# Altium PCB MMC_2_2.PcbDoc (part 1 of 2)
Units mm, origin at the board's own origin, x right, y up, seen from the top; angles counter-clockwise.
Board outline 99.21 x 82.02 mm, 4 copper layers (Top Layer, 3V3, GND, Bottom Layer), stack 0.778 mm thick; 83 components, 83 nets, 360 pads, 124 vias.
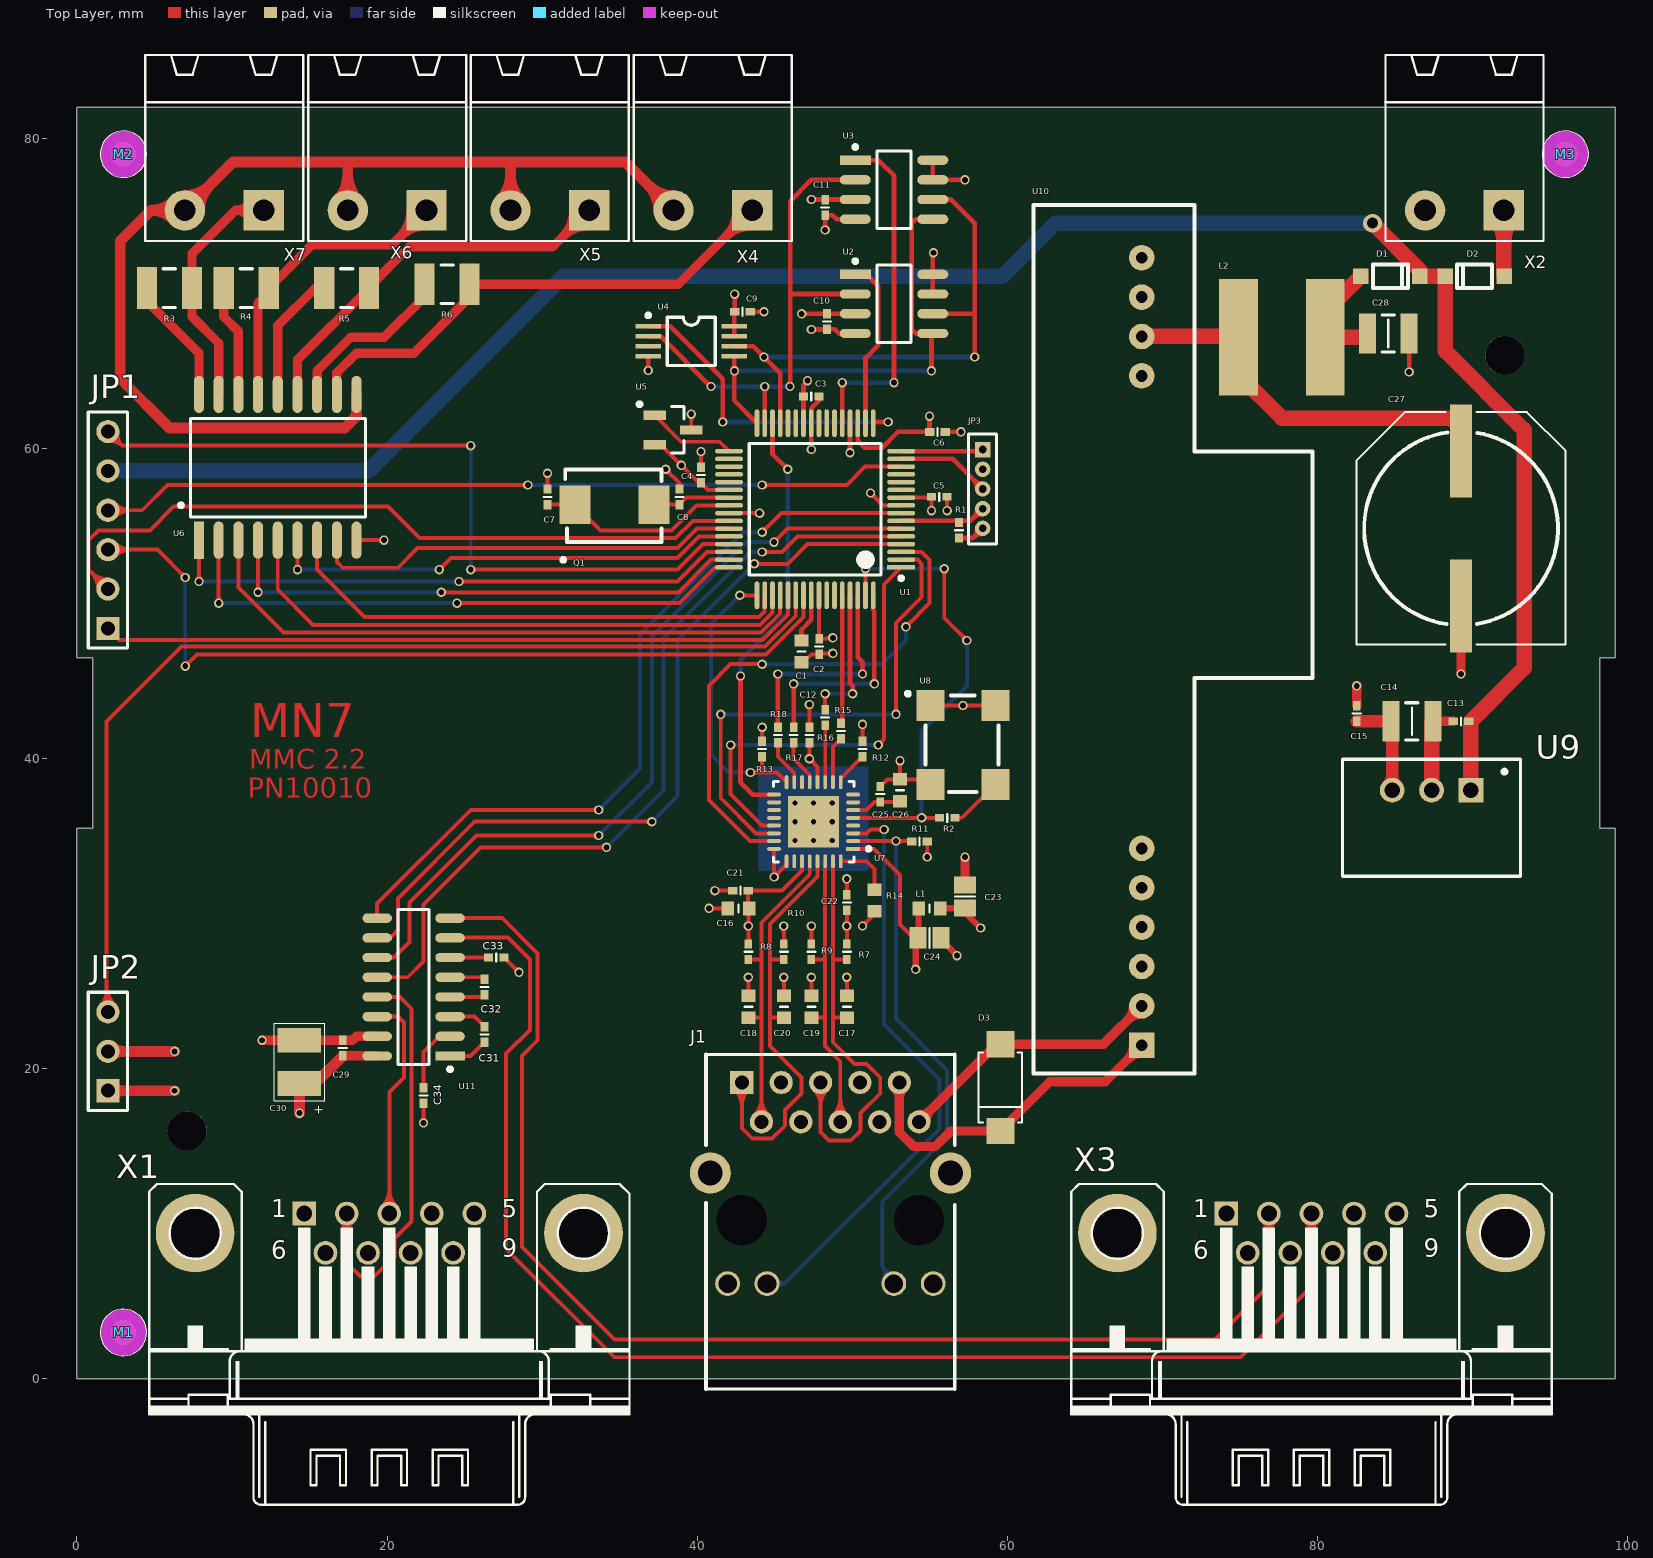
[diagram p0: Top Layer view]
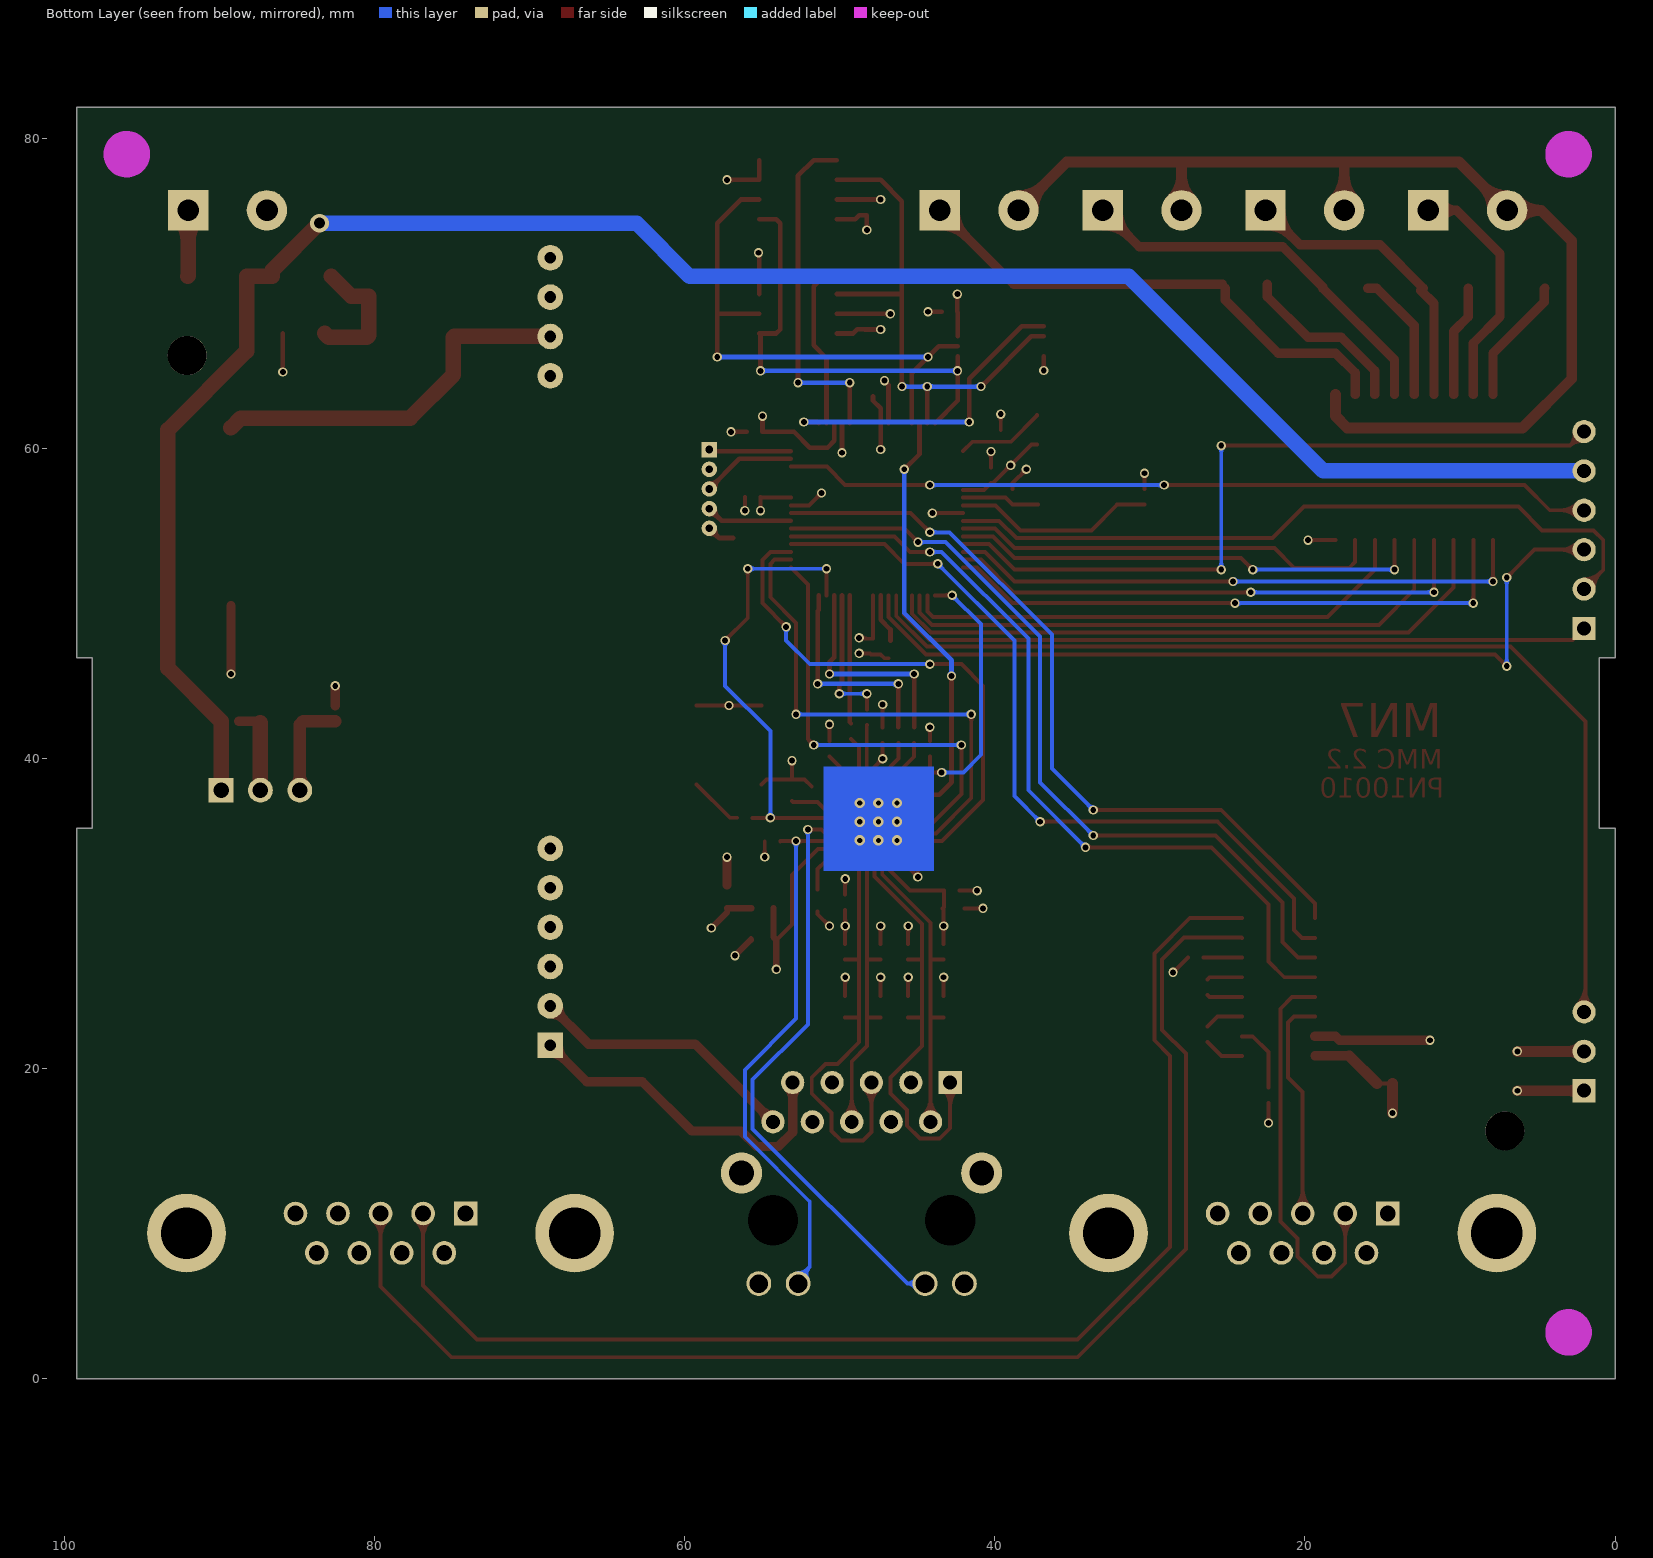
[diagram p1: Bottom Layer view, seen from below]
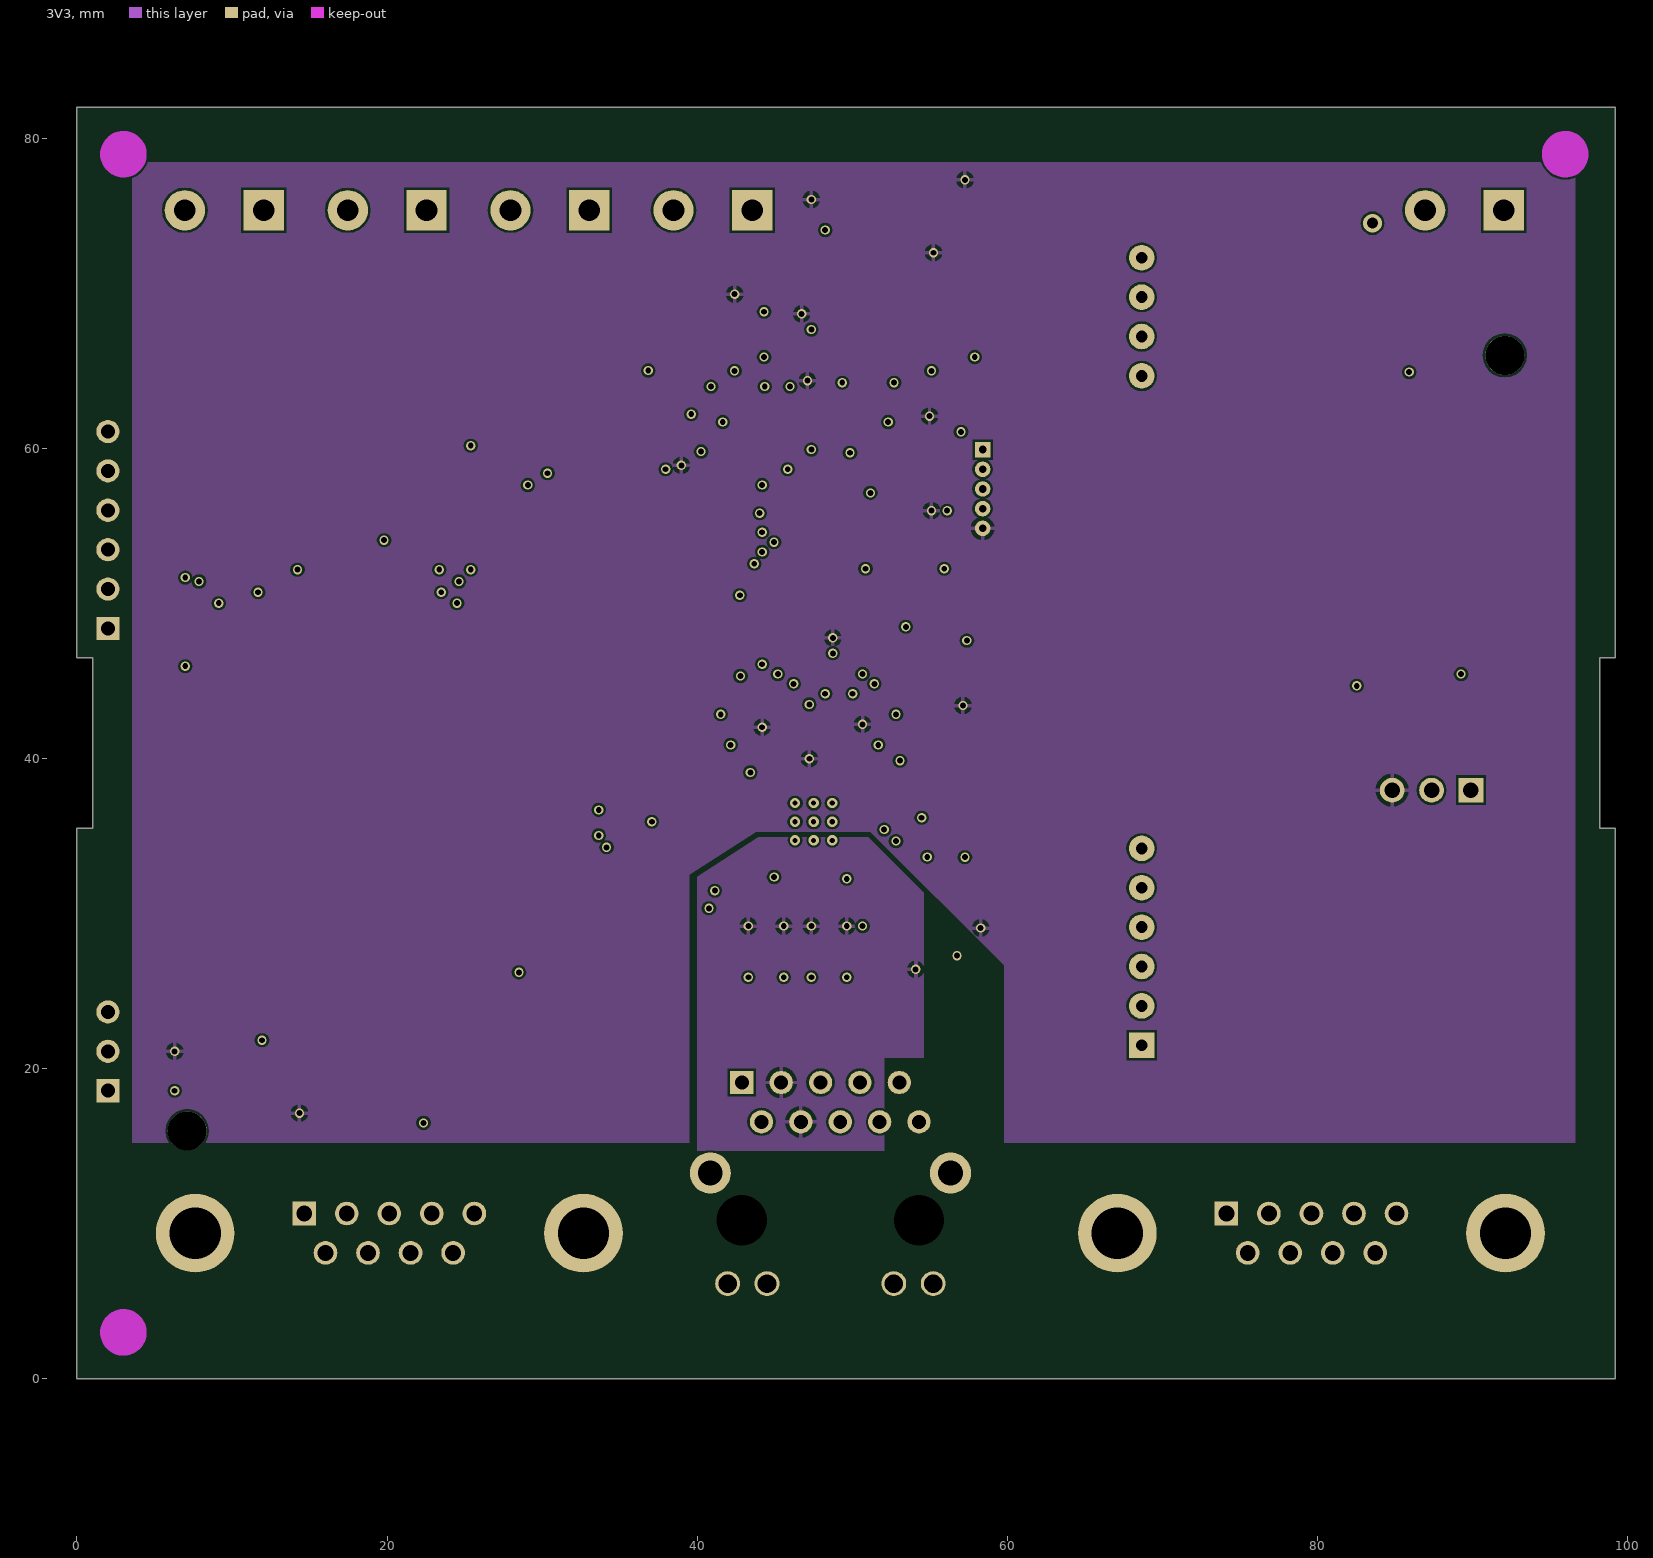
[diagram p2: 3V3]
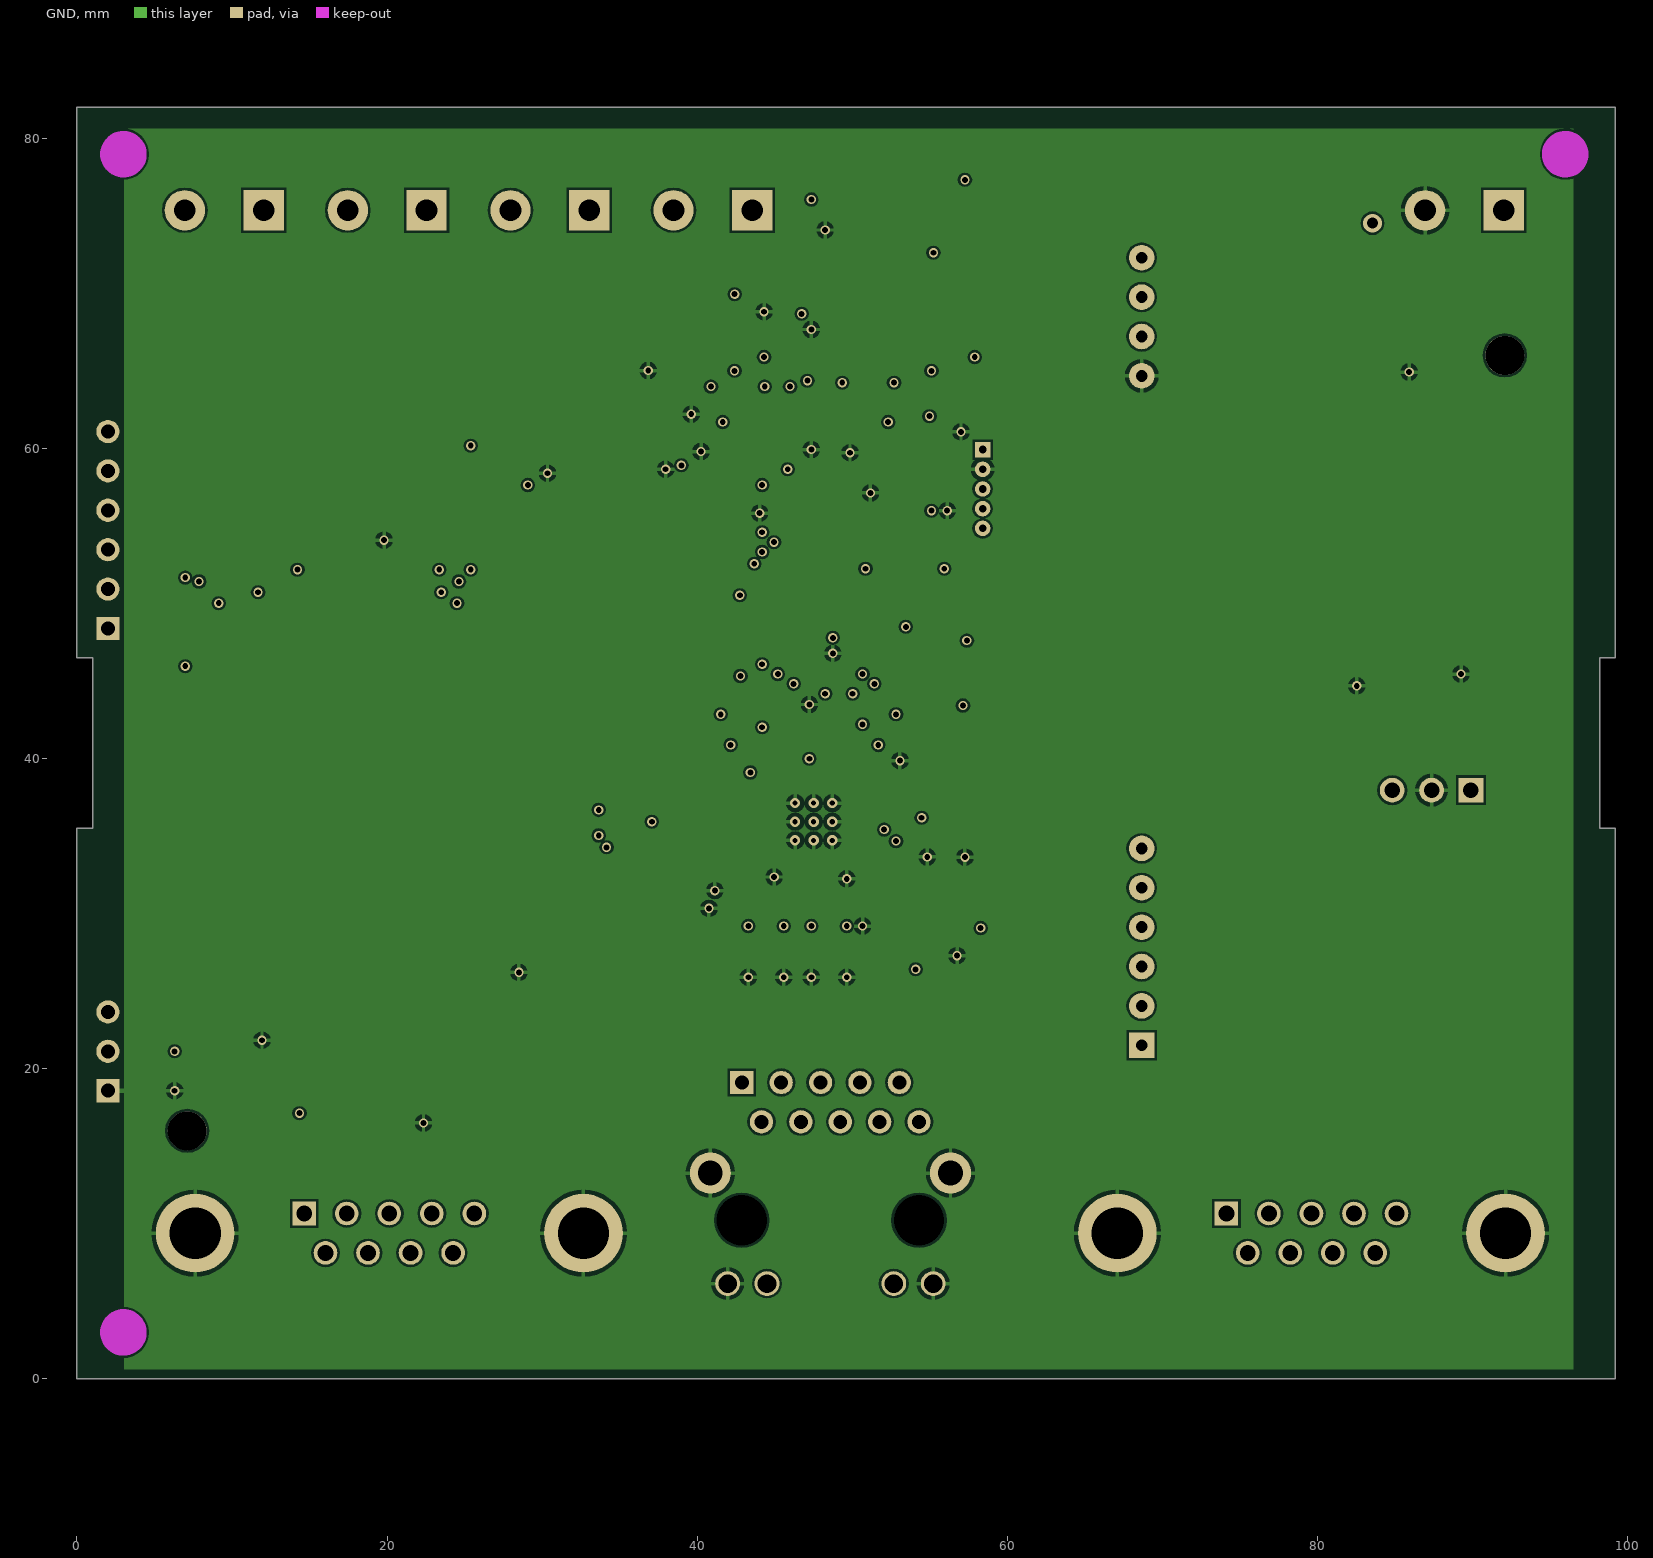
[diagram p3: GND]

## Layer stack, top to bottom
Top Solder: solder mask 0.0102, Solder Resist, Dk 3.5
Top Layer: signal copper 0.0356
Dielectric 1: core 0.254, FR-4, Dk 4.2
3V3: signal copper 0.036
Dielectric 3: prepreg 0.127, Dk 4.2
GND: signal copper 0.036
Dielectric 2: core 0.254, Dk 4.2
Bottom Layer: signal copper 0.0356
Bottom Solder: solder mask 0.0102, Solder Resist, Dk 3.5

## Board outline
0,0 0,35.509 1.016,35.509 1.016,46.507 0,46.507 0,82.017 99.212,82.017 99.212,46.507 98.222,46.507 98.222,35.509 99.212,35.509 99.212,0

## Design rules (kind name [scope] priority, off if disabled: settings)
Clearance [All] p1: gap=0.15
ComponentClearance [All] p1: gap=0 collisioncheckmode=3 verticalgap=0 showdistances=FALSE
HoleSize [All] p1: absolutevalues=TRUE maxlimit=4 minlimit=0.025 maxpercent=80.000 minpercent=20.000
MinimumSolderMaskSliver [(HasFootprint('32M1-A_M') AND  InComponent('R14') AND InComponent('R13') AND InComponent('JP3'))] p1: minsoldermaskwidth=0.05
MinimumSolderMaskSliver MinimumSolderMaskSliver_IC [HasFootprint('32M1-A_M')] p2: minsoldermaskwidth=0.03
PolygonConnect [All] p1: connectstyle=Relief reliefconductorwidth=0.254 reliefentries=4 polygonreliefangle="90 Angle" airgapwidth=0.254
RoomDefinition MMC_2_2_PSU [InComponentClass('MMC_2_2_PSU')] p1: confinementstyle=ConfineIn formatcopy=TRUE lockcomponents=FALSE outline -4.826,-12.446 103.378,-12.446 103.378,87.757 -4.826,87.757
RoomDefinition MMC_2_2_Ethernet [InComponentClass('MMC_2_2_Ethernet')] p2: confinementstyle=ConfineIn formatcopy=TRUE lockcomponents=FALSE outline -8.636,-9.398 106.934,-9.398 106.934,90.424 -8.636,90.424
RoomDefinition MMC_2_2_MCU [InComponentClass('MMC_2_2_MCU')] p3: confinementstyle=ConfineIn formatcopy=TRUE lockcomponents=FALSE outline -7.112,-10.922 105.283,-10.922 105.283,88.9 -7.112,88.9
RoutingVias [All] p1: holewidth=0.381 width=0.584 viastyle="Through Hole" minholewidth=0.3 minwidth=0.3 maxholewidth=0.711 maxwidth=1.27
SilkToBoardRegionClearance [(HasFootprint('M09HP') AND HasFootprint('MSTBA 2,5_2-G-5,08-LR') AND IsEmbeddedBoard)] p1:
SilkToSilkClearance [All] p1: silktosilkclearance=0.12
SilkToSolderMaskClearance SilkToSolderMaskClearance_1 [HasFootprint('M09HP')] p1: minsilkscreentomaskgap=0 clearancetoexposedcopper=TRUE
SilkToSolderMaskClearance [IsPad] p2: minsilkscreentomaskgap=0.05 clearancetoexposedcopper=TRUE
SolderMaskExpansion [All] p1: expansion=0.102
Width [All] p1: maxlimit=2 minlimit=0.254 preferedwidth=0.3
24 further rules are at their usual default settings.

## Classes and differential pairs
component class MMC_2_2_MCU: C1 C2 C3 C4 C5 C6 C7 C8 C9 C10 C11 JP1 JP2 JP3 M1 M2 M3 Q1 R1 U1 U2 U3 U4 U5
component class MMC_2_2_Ethernet: C12 C16 C17 C18 C19 C20 C21 C22 C23 C24 C25 C26 C29 C30 C31 C32 C33 C34 J1 L1 R2 R3 R4 R5 R6 R7 R8 R9 R10 R11 R12 R13 R14 R15 R16 R17 R18 U6 U7 U8 U11 X1 X3 X4 X5 X6 X7
component class MMC_2_2_PSU: C13 C14 C15 C27 C28 D1 D2 D3 L2 U9 U10 X2

## Components (designator, comment, footprint, x,y, rotation, side; value= is the part's Value field where it differs from the comment)
C1 "10uF10V_0603" C0603 46.736,46.928 r270 top
C2 "100nF16V_0402" C0402 47.879,47.244 r270 top
C3 "100nF16V_0402" C0402 47.363,63.373 r0 top
C4 "100nF16V_0402" C0402 40.259,58.301 r90 top
C5 "100nF16V_0402" C0402 55.626,56.896 r0 top
C6 "100nF16V_0402" C0402 55.499,61.087 r0 top
C7 "22pF50V_0402" C0402 30.353,56.896 r90 top
C8 "22pF50V_0402" C0402 38.862,56.896 r90 top
C9 "100nF16V_0402" C0402 42.926,68.834 r0 top
C10 "100nF16V_0402" C0402 48.387,68.199 r270 top
C11 "100nF16V_0402" C0402 48.26,75.565 r270 top
C12 "100nF16V_0402" C0402 47.244,41.529 r90 top
C13 "100nF25V_0402" C0402 89.281,42.418 r180 top
C14 "10uF25V_1210" C1210 86.106,42.418 r0 top
C15 "100nF25V_0402" C0402 82.55,42.926 r90 top
C16 "22nF50V_0603" C0603 42.672,30.353 r180 top
C17 "10pF50V_0603" C0603 49.657,24.003 r90 top
C18 "10pF50V_0603" C0603 43.307,24.003 r90 top
C19 "10pF50V_0603" C0603 47.371,24.003 r90 top
C20 "10pF50V_0603" C0603 45.593,24.003 r90 top
C21 "100nF25V_0402" C0402 42.799,31.496 r180 top
C22 "100nF25V_0402" C0402 49.657,30.734 r90 top
C23 "4u7F25V_0805" C0805 57.277,31.115 r90 top
C24 "4u7F25V_0805" C0805 54.991,28.448 r0 top
C25 "470pF50V_0402" C0402 51.816,37.719 r90 top
C26 "1uF50V_0603" C0603 53.086,37.973 r90 top
C27 "470uF25V_POL" Panasonic-H13 89.281,54.864 r90 top
C28 "10uF50V_1210" C1210 84.582,67.437 r0 top
C29 "100nF25V_0402" C0402 17.145,21.336 r90 top
C30 "10uF_20V_V293D-B" Vishay293D-B 14.351,20.447 r270 top
C31 "100n50V_0402" C0402 26.289,22.225 r270 top
C32 "100n50V_0402" C0402 26.289,25.273 r270 top
C33 "100n50V_0402" C0402 27.051,27.178 r0 top
C34 "100n50V_0402" C0402 22.352,18.288 r270 top
D1 "RB160M-30TR" SOD123 84.709,71.12 r0 top
D2 "SD103AW-V-GS08" SOD123 90.17,71.12 r180 top
D3 "SMAJ58A-E3/61" DO214A 59.563,18.796 r270 top
J1 "7499210121A" 7499210121A 48.6,10.23 r180 top locked
JP1 "Header 6_2.54" HDR1X6_2.54 2,54.76 r90 top
JP2 "Header-3" HDR1X3 2,21.13 r90 top
JP3 "ICDI" HDR1X5-1.27 58.42,57.404 r270 top
L1 "120R4A_0603" L0603 54.991,30.353 r0 top
L2 "10uF2A" WE-PD2_1 77.724,67.183 r0 top
M1 "Mark" Mark-3mm 3,3 r0 top
M2 "Mark" Mark-3mm 3,79 r0 top
M3 "Mark" Mark-3mm 96,79 r0 top
Q1 "7A-8.000MAAJ-T" TXC_7A 34.671,56.388 r0 top
R1 "10k_0402" R0402 56.896,54.737 r270 top
R2 "33R_0402" R0402 56.134,36.195 r180 top
R3 "270R_1210" R1210_N 5.969,70.358 r0 top
R4 "270R_1210" R1210_N 10.922,70.358 r0 top
R5 "270R_1210" R1210_N 17.399,70.358 r0 top
R6 "270R_1210" R1210_N 23.876,70.612 r0 top
R7 "49R9_0402" R0402 49.657,27.559 r90 top
R8 "49R9_0402" R0402 43.307,27.559 r90 top
R9 "49R9_0402" R0402 47.371,27.559 r90 top
R10 "49R9_0402" R0402 45.593,27.559 r90 top
R11 "10k_0402" R0402 54.348,34.671 r180 top
R12 "10k_0402" R0402 50.673,40.64 r90 top
R13 "1k5_0402" R0402 44.196,40.64 r90 top
R14 "12k1_0603" R0603(1608) 51.435,30.861 r90 top
R15 "10R_0402" R0402 49.276,41.783 r90 top
R16 "10R_0402" R0402 48.26,42.672 r90 top
R17 "10R_0402" R0402 46.228,41.529 r90 top
R18 "10R_0402" R0402 45.212,41.529 r90 top
U1 "PIC32MX695F512H-80I/PT" TQFP-64_N1 47.613,56.096 r180 top
U2 "25LC1024-I_SM" SOP8_N 52.705,69.342 r0 top
U3 "25LC1024-I_SM" SOP8_N 52.705,76.708 r0 top
U4 "23LC1024-I_ST" TSSOP8 39.624,66.929 r270 top
U5 "11AA02E48T-I_TT" SOT23_M 38.449,61.214 r0 top
U6 "ULN2803ADW" SOIC18-WIDE 12.954,58.801 r90 top
U7 "LAN8741-EN" 32M1-A_M 47.519,35.941 r180 top
U8 "TXC-7W-50.000MBB-T" TXC_7W 57.15,40.894 r270 top
U9 "R-783.3-0.5" R-783_3-0_5 87.376,37.973 r180 top
U10 "AG-9412-S" AG-9412-S-1 68.68,21.52 r90 top locked
U11 "MAX3232CSE" SOIC16_L 21.717,25.273 r180 top
X1 "SUB-D_9" M09HP 20.147,9.4 r0 top locked
X2 "PhoenixMSTBA-2" "MSTBA 2,5_2-G-5,08-LR" 89.5,75.4 r180 top locked
X3 "SUB-D_9" M09HP 79.63,9.4 r0 top locked
X4 "PhoenixMSTBA-2" "MSTBA 2,5_2-G-5,08-LR" 41.015,75.4 r180 top locked
X5 "PhoenixMSTBA-2" "MSTBA 2,5_2-G-5,08-LR" 30.5,75.4 r180 top locked
X6 "PhoenixMSTBA-2" "MSTBA 2,5_2-G-5,08-LR" 20.01,75.4 r180 top locked
X7 "PhoenixMSTBA-2" "MSTBA 2,5_2-G-5,08-LR" 9.5,75.4 r180 top locked

## Footprints (in the part's own frame and the unit in brackets; to place one, negate y for a bottom-side part, rotate by r counter-clockwise, add the part's x,y. Pads: shape width x height; smd on the part's side, far side on the other; paste and mask are expansions set on the pad)
32M1-A_M [mm] "QFN, 32-Leads, Body 5x5mm, Pitch 0.5mm, IPC Low Density"
  rect 0.9x0.25 smd: 1(-2.55,1.75)
  oval 0.9x0.25 smd: 2(-2.55,1.25) 3(-2.55,0.75) 4(-2.55,0.25) 5(-2.55,-0.25) 6(-2.55,-0.75) 7(-2.55,-1.25) 8(-2.55,-1.75) 17(2.55,-1.75) 18(2.55,-1.25) 19(2.55,-0.75) 20(2.55,-0.25) 21(2.55,0.25) 22(2.55,0.75) 23(2.55,1.25) 24(2.55,1.75)
  oval 0.25x0.9 smd: 9(-1.75,-2.55) 10(-1.25,-2.55) 11(-0.75,-2.55) 12(-0.25,-2.55) 13(0.25,-2.55) 14(0.75,-2.55) 15(1.25,-2.55) 16(1.75,-2.55) 25(1.75,2.55) 26(1.25,2.55) 27(0.75,2.55) 28(0.25,2.55) 29(-0.25,2.55) 30(-0.75,2.55) 31(-1.25,2.55) 32(-1.75,2.55)
  rect 3.3x3.3 smd: 33(0,0)
  silkscreen extent -3.68,-2.6 2.6,2.6, body extent -2.58,-2.58 2.58,2.58, height 1
7499210121A [mm] "Connector; PCB Jack, Thru-Hole; RJ45,POE; Shielded with Lightpipes; Right Angle"
  rect 1.5x1.5 hole 0.9: 1(5.715,-8.89)
  round 1.5 hole 0.9: 2(4.445,-6.35) 3(3.175,-8.89) 4(1.905,-6.35) 5(0.635,-8.89) 6(-0.635,-6.35) 7(-1.905,-8.89) 8(-3.175,-6.35) 9(-4.445,-8.89) 10(-5.715,-6.35)
  round 1.6 hole 1.2: 11(4.09,4.08) 12(6.63,4.08) 13(-4.09,4.08) 14(-6.63,4.08)
  round 2.65 hole 1.6: MH1(-7.745,-3.05) MH2(7.745,-3.05)
  round 2.95 hole 3.25 unplated: MH3(-5.715,0) MH4(5.715,0)
  silkscreen extent -8.02,-10.7 8.02,10.89, body extent -8,-10.67 8,11.18, height 13.74
AG-9412-S-1 [mm]
  rect 1.65x1.65 hole 0.762: 1(0,0)
  round 1.65 hole 0.762: 2(2.54,0) 3(5.08,0) 4(7.62,0) 5(10.16,0) 6(12.7,0) 7(43.18,0) 8(45.72,0) 9(48.26,0) 10(50.8,0)
  silkscreen extent -1.81,-11.02 54.2,6.98, body extent -1.8,-11 54.25,7, height 14
C0402 [mm] "Chip Capacitor, Body 1.0x0.5mm, IPC High Density"
  rect 0.6x0.5 smd: 1(-0.5,0) 2(0.5,0)
  silkscreen extent 0,-0.25 0,0.25, body extent -0.55,-0.3 0.55,0.3, height 0.5
C0603 [mm] "Chip Capacitor, 0603"
  rect 0.8x0.9 smd: 1(-0.7,0) 2(0.7,0)
  silkscreen extent 0,-0.25 0,0.25, body extent -0.87,-0.48 0.87,0.48, height 0.6
C0805 [mm] "Chip Capacitor, Body 2.0x1.3mm, IPC High Density"
  rect 1.1x1.4 smd: 1(-0.75,0) 2(0.75,0)
  silkscreen extent 0,-0.64 0,0.64, body extent -1.1,-0.72 1.1,0.72, height 1.4
C1210 [mm] "Chip Capacitor, Body 3.2x2.5mm, IPC High Density"
  rect 1.1x2.6 smd: 1(-1.35,0) 2(1.35,0)
  silkscreen extent -0.4,-1.2 0.4,1.2, body extent -1.7,-1.35 1.7,1.35, height 1.3
DO214A [mm] "Diode; 2 Leads"
  rect 1.7x1.8 smd: 1(2.8,0) 2(-2.8,0)
  silkscreen extent -2.25,-1.4 2.25,1.4, body extent -2.25,-1.4 2.25,1.4, height 2.3
HDR1X3 [mm] "Connector; Header; 3 Position"
  rect 1.5x1.5 hole 0.9: 1(-2.54,0)
  round 1.5 hole 0.9: 2(0,0) 3(2.54,0)
  silkscreen extent -3.81,-1.27 3.81,1.27, body extent -3.81,-1.27 3.81,1.27, height 7
HDR1X5-1.27 [mm] "Connector; Header; 5 Position"
  rect 1x1 hole 0.5: 1(-2.54,0)
  round 1 hole 0.5: 2(-1.27,0) 3(0,0) 4(1.27,0) 5(2.54,0)
  silkscreen extent -3.55,-0.9 3.55,0.9, body extent -3.56,-0.89 3.56,0.89, height 7
HDR1X6_2.54 [mm] "Connector; Header; 6 Position"
  rect 1.5x1.5 hole 0.9: 1(-6.35,0)
  round 1.5 hole 0.9: 2(-3.81,0) 3(-1.27,0) 4(1.27,0) 5(3.81,0) 6(6.35,0)
  silkscreen extent -7.62,-1.27 7.62,1.27, body extent -7.62,-1.27 7.64,1.27, height 7
L0603 [mm] "Chip Ferrit, 0603"
  rect 0.8x0.9 smd: 1(-0.7,0) 2(0.7,0)
  silkscreen extent 0,-0.25 0,0.25, body extent -0.87,-0.48 0.87,0.48, height 0.6
M09HP [mil]
  rect 60x60 hole 40: 1(-216,50)
  round 60 hole 40: 2(-108,50) 3(0,50) 4(108,50) 5(216,50) 6(-162,-50) 7(-54,-50) 8(54,-50) 9(162,-50)
  round 200 hole 130: 10(-493,0) 10(493,0)
  silkscreen extent -610,-690 610,125, body extent -610,-691 609,126, height 512
Mark-3mm [mm]
  round 1.6 smd paste-2: 0(0,0)
  Keep-Out Layer circle w2: c0,0 r0.5
  silkscreen extent -1.5,-1.5 1.5,1.5
"MSTBA 2,5_2-G-5,08-LR" [mm]
  rect 2.6x2.6 hole 1.4: 1(-2.54,0.02)
  round 2.6 hole 1.4: 2(2.54,0.02)
  silkscreen extent -5.1,-10 5.11,2, body extent -5.09,-10 5.11,1.99, height 8.6
Panasonic-H13 [mm] "SMD electrolytic, Panasonic"
  rect 6x1.4 smd: 1(5,0) 2(-5,0)
  silkscreen extent -7.5,-6.75 7.5,6.75, body extent -7.5,-6.75 7.5,6.75, height 13
R0402 [mm] "Chip Resistor, Body 1.0x0.5mm"
  rect 0.6x0.5 smd: 1(-0.5,0) 2(0.5,0)
  silkscreen extent 0,-0.25 0,0.25, body extent -0.55,-0.3 0.55,0.3, height 0.55
R0603(1608) [mm] "Chip Resistor, 0603"
  rect 0.8x0.9 smd: 1(-0.7,0) 2(0.7,0)
  body extent -0.87,-0.48 0.87,0.48, height 0.6
R1210_N [mm] "Chip Resistor Body 3.2x2.5mm"
  rect 1.3x2.7 smd: 1(-1.45,0) 2(1.45,0)
  silkscreen extent -0.4,-1.25 0.4,1.25, body extent -1.7,-1.35 1.7,1.35, height 1.5
R-783_3-0_5 [mm] "Recon DC-DC"
  rect 1.6x1.6 hole 1: 1(-2.54,0)
  round 1.6 hole 1: 2(0,0) 3(2.54,0)
  silkscreen extent -5.75,-2 5.75,5.55, body extent -5.72,-2.03 5.71,5.59, height 10.2
SOD123 [mm]
  rect 1x1 smd: 1(1.905,0) 2(-1.905,0)
  silkscreen extent -1.1,-0.76 1.14,0.76, body extent -1.4,-0.85 1.4,0.88, height 1.4
SOIC16_L [mm] "SOIC, 16-Leads, Body 9.9x3.9mm, Pitch 1.27mm, IPC High Density"
  rect 1.9x0.6 smd: 1(-2.35,4.445)
  oval 1.9x0.6 smd: 2(-2.35,3.175) 3(-2.35,1.905) 4(-2.35,0.635) 5(-2.35,-0.635) 6(-2.35,-1.905) 7(-2.35,-3.175) 8(-2.35,-4.445) 9(2.35,-4.445) 10(2.35,-3.175) 11(2.35,-1.905) 12(2.35,-0.635) 13(2.35,0.635) 14(2.35,1.905) 15(2.35,3.175) 16(2.35,4.445)
  silkscreen extent -2.48,-5 1,5.42, body extent -2,-5 2,5, height 1.91
SOIC18-WIDE [mm] "SOIC, 18-Leads"
  rect 2.4x0.65 smd: 1(-4.7,5.08)
  oval 2.4x0.65 smd: 2(-4.7,3.81) 3(-4.7,2.54) 4(-4.7,1.27) 5(-4.7,0) 6(-4.7,-1.27) 7(-4.7,-2.54) 8(-4.7,-3.81) 9(-4.7,-5.08) 10(4.7,-5.08) 11(4.7,-3.81) 12(4.7,-2.54) 13(4.7,-1.27) 14(4.7,0) 15(4.7,1.27) 16(4.7,2.54) 17(4.7,3.81) 18(4.7,5.08)
  silkscreen extent -3.2,-5.65 3.15,6.37, body extent -3.8,-5.65 3.85,5.64, height 1.91
SOP8_N [mm] "SOIC, 8-Leads, Body 4.9x3.9mm, Pitch 1.27mm, IPC Medium Density"
  rect 2x0.6 smd: 1(-2.5,1.905)
  oval 2x0.6 smd: 2(-2.5,0.635) 3(-2.5,-0.635) 4(-2.5,-1.905) 5(2.5,-1.905) 6(2.5,-0.635) 7(2.5,0.635) 8(2.5,1.905)
  silkscreen extent -2.62,-2.5 1.1,2.88, body extent -2,-2.5 2,2.5, height 1.75
SOT23_M [mm] "SOT23, 3-Leads, Body 2.9x1.3mm, Pitch 0.95mm, Lead Span 2.3mm - Reverse Pinning, IPC Low Density"
  rect 1.45x0.6 smd: 1(1.175,0) 2(-1.175,-0.95) 3(-1.175,0.95)
  silkscreen extent -2.28,-1.5 0.7,1.78, body extent -0.7,-1.5 0.7,1.5, height 1.1
TQFP-64_N1 [mm] "64-Pin Thin Plastic Quad Flat Pack 0.5 mm Pitch, 1.0/0.1 mm Lead Form, IPC Medium Density"
  rect 1.8x0.3 smd: 1(-5.55,3.75)
  oval 1.8x0.3 smd: 2(-5.55,3.25) 3(-5.55,2.75) 4(-5.55,2.25) 5(-5.55,1.75) 6(-5.55,1.25) 7(-5.55,0.75) 8(-5.55,0.25) 9(-5.55,-0.25) 10(-5.55,-0.75) 11(-5.55,-1.25) 12(-5.55,-1.75) 13(-5.55,-2.25) 14(-5.55,-2.75) 15(-5.55,-3.25) 16(-5.55,-3.75) 33(5.55,-3.75) 34(5.55,-3.25) 35(5.55,-2.75) 36(5.55,-2.25) 37(5.55,-1.75) 38(5.55,-1.25) 39(5.55,-0.75) 40(5.55,-0.25) 41(5.55,0.25) 42(5.55,0.75) 43(5.55,1.25) 44(5.55,1.75) 45(5.55,2.25) 46(5.55,2.75) 47(5.55,3.25) 48(5.55,3.75)
  oval 0.3x1.8 smd: 17(-3.75,-5.55) 18(-3.25,-5.55) 19(-2.75,-5.55) 20(-2.25,-5.55) 21(-1.75,-5.55) 22(-1.25,-5.55) 23(-0.75,-5.55) 24(-0.25,-5.55) 25(0.25,-5.55) 26(0.75,-5.55) 27(1.25,-5.55) 28(1.75,-5.55) 29(2.25,-5.55) 30(2.75,-5.55) 31(3.25,-5.55) 32(3.75,-5.55) 49(3.75,5.55) 50(3.25,5.55) 51(2.75,5.55) 52(2.25,5.55) 53(1.75,5.55) 54(1.25,5.55) 55(0.75,5.55) 56(0.25,5.55) 57(-0.25,5.55) 58(-0.75,5.55) 59(-1.25,5.55) 60(-1.75,5.55) 61(-2.25,5.55) 62(-2.75,5.55) 63(-3.25,5.55) 64(-3.75,5.55)
  silkscreen extent -5.68,-4.25 4.25,4.57, body extent -5,-5 5,5, height 1.2
TSSOP8 [mm] "Shrink Small Outline, Plastic, Thin; 8 Leads; Body Width 4.4 mm; Pitch 0.65 mm"
  rect 0.3x1.65 smd: 1(-0.975,-2.775) 2(-0.325,-2.775) 3(0.325,-2.775) 4(0.975,-2.775) 5(0.975,2.775) 6(0.325,2.775) 7(-0.325,2.775) 8(-0.975,2.775)
  silkscreen extent -1.8,-2.9 1.55,1.55, body extent -1.52,-1.52 1.52,1.52, height 1
TXC_7A [mm]
  rect 2x2.5 smd: 1(-2.54,0) 2(2.54,0)
  silkscreen extent -3.43,-3.68 3.05,2.29, body extent -3.17,-2.41 3.05,2.25, height 1.3
TXC_7W [mm]
  rect 2x1.8 smd: 1(-2.54,-2.1) 2(2.54,-2.1) 3(2.54,2.1) 4(-2.54,2.1)
  silkscreen extent -3.43,-3.68 3.05,2.29, body extent -3.18,-2.41 3.05,2.25, height 1.3
Vishay293D-B [mm]
  rect 1.6x2.8 smd: 1(1.397,0) 2(-1.397,0)
  silkscreen extent -2.5,-1.63 2.5,1.63, body extent -1.75,-1.38 1.75,1.38, height 1.6
WE-PD2_1 [mm]
  rect 2.5x7.5 smd: 1(-2.794,0) 2(2.794,0)
  body extent -3.9,-3.49 3.89,3.49, height 5

## Part data
C1 C2 C3 C4 C5 C6 C9 C10 C11 C12 C14: "Capacitor"
C7 C8: "Murata, GRM series, 50V"
C13 C15 C21 C22 C29: "AVX, X5R, 10%, 25V"
C16: "AVX ,  X7R, 5%, 50V"
C17 C18 C19 C20: "AVX ,  +-0.5pF, 50V"
C23 C24: "TDK  C series, X7R, 10%, 25V"
C25: "AVX, 50V"
C26: "C series, X5R, 10%"
C27: "Panasonic, TG series"
C28: "AVX,  X7R, 10%, 50V"
C30: "293 series, tantal, 10%, 10V"
C31 C32 C33 C34: "C series, X5R, 10%, 50V"
D1 D2: "Diode Schottky,2A,40V"
D3: "TVS, 400W, 58V"
J1: library part "Ethernet, POE, WE7499210121A", "Modular Jack , Right Angle RJ-45, Low Profile"
JP1: "Header, 6-Pin"
JP2: "Header-3-Pin"
JP3: "Header, 5-Pin"
L1: "Murata, Ferrit, 120Rx2A"
L2: library part 10uF2A_WE-PD2, "WE-PD2, 10uF2A"
Q1: library part Crystal_8MHz, "Crystal, 7A-8.000MAAJ-T"
R1 R11 R12 R13 R15 R16 R17 R18: "Vishay CRCW series, 125mW, 1%"
R2 R7 R8 R9 R10: "Vishay CRCW series, 63mW, 1%"
R3 R4 R5 R6: "ERJ series, 500mW, 5%"
R14: "Vishay, CRCW series, 100mW, 1%"
U1: "High Performance ROM-less Microcontroller with External Memory Bus, 1.5K RAM, 64-Pin TQFP, 4.2 to 5.5V Supply Range, Industrial Temperature"
U2 U3: "1024 Kbit Serial SPI Bus EEPROM"
U4: "1 Mbit Serial  EEPROM"
U5: "2 kbit Serial  EEPROM"
U6: "Darlington array, 50V"
U7: "Ethernet Phy"
U8: "Crystal"
U9: library part Recom-R-783_3-0_5, "Voltage Regulator"
U10: "PoE, 12V"
U11: "RS232 transceiver"

## Free pads (board coordinates)
  round 2.515 hole 2.515: 1(7.112,16.002) 1(92.1,66.015)

## Via types
v1: diameter 0.6, hole 0.381, Top Layer to Bottom Layer, 114 vias
v2: diameter 0.66, hole 0.33, Top Layer to Bottom Layer, tented top, 9 vias
v3: diameter 1.2, hole 0.711, Top Layer to Bottom Layer, 1 vias

## Nets (pads, with @x,y where several pads share a name; then routed paths per layer and width w, separated by ;. In a path a pad name is that pad's centre, name@x,y a point inside that pad or via, vN(x,y) a via of type N, cw(c..) or ccw(c..) an arc to the next point about the centre after c; other vN are vias at no path point)
3V3: C2.1 C3.1 C4.1 C5.1 C6.1 C9.1 C10.1 C11.1 C12.1 C14.1 C15.1 C23.1 C29.1 C30.1 JP2.2 JP3.5 L1.2 R1.2 R12.2 R13.2 U1.10 U1.19 U1.26 U1.38 U1.57 U2.3 U2.7 U2.8 U3.3 U3.7 U3.8 U4.7 U4.8 U5.2 U7.12 U8.1 U8.4 U9.3 U11.16 | length 83.6
  Top Layer w0.254: C30.1@14.351,19.05 C30.1@15.359,19.05 ; U11.16@19.359,20.836 U11.16@19.367,20.828 ; U5.2@37.274,60.264 37.653,60.264 v1(38.989,58.928) 40.116,57.801 C4.1@40.259,57.801 40.714,57.346 U1.38@42.063,57.346 ; v1@38.816,58.928 ccw(c38.398,58.928) 38.694,59.223 ccw(c38.989,59.519) v1@38.989,59.101 ; v1@38.989,58.755 cw(c38.989,58.337) 39.284,58.633 cw(c39.58,58.928) v1@39.162,58.928 ; v1@44.074,41.915 cw(c43.778,41.619) 44.196,41.619 cw(c44.614,41.619) v1@44.318,41.915 ; R13.2@44.196,41.14 v1(44.196,42.037) ; v1@47.122,40.127 ccw(c46.826,40.423) 47.244,40.423 ccw(c47.662,40.423) v1@47.366,40.127 ; v1@47.244,39.832 cw(c47.244,39.414) 47.539,39.71 cw(c47.835,40.005) v1@47.417,40.005 ; C12.1@47.244,41.029 v1(47.244,40.005) 47.769,39.48 U7.12@47.769,38.491 ; C2.1@47.863,47.744 U1.57@47.863,50.546 ; C2.1@47.879,47.744 48.704,47.744 v1(48.76,47.8) ; 48.207,47.744 ccw(c48.207,48.353) v1@48.638,47.922 ; v1@50.551,42.098 cw(c50.255,41.802) 50.673,41.802 cw(c51.091,41.802) v1@50.795,42.098 ; R12.2@50.673,41.14 v1(50.673,42.22) v1@50.673,42.291 ; U1.10@53.163,56.846 55.076,56.846 C5.1@55.126,56.896 55.126,56.015 v1(55.118,56.007) ; U8.1@55.05,43.434 v1(57.15,43.434) U8.4@59.25,43.434 ; L1.2@55.691,30.353 L1.2@55.703,30.365 ; v1@57.028,43.312 ccw(c56.732,43.016) 56.732,43.434 ccw(c56.732,43.852) v1@57.028,43.556 ; v1@57.272,43.312 cw(c57.568,43.016) 57.568,43.434 cw(c57.568,43.852) v1@57.272,43.556 ; C23.1@57.277,30.099 C23.1@57.277,30.365
  Top Layer w0.3: v1@42.32,69.863 cw(c42.064,69.607) 42.426,69.607 cw(c42.788,69.607) v1@42.532,69.863 ; U4.7@42.399,67.254 U4.8@42.399,67.904 42.399,68.807 C9.1@42.426,68.834 v1(42.426,69.969) v1@42.418,69.977 ; v1(46.744,68.699) C10.1@48.387,68.699 50.197,68.699 U2.3@50.205,68.707 ; v1@46.85,68.593 cw(c47.106,68.337) 47.106,68.699 cw(c47.106,69.061) v1@46.85,68.805 ; U1.26@46.863,61.646 C3.1@46.863,63.373 46.863,64.135 v1(47.117,64.389) v1@46.99,64.389 ; v1(47.371,76.073) U3.3@50.205,76.073 ; v1@47.477,75.967 cw(c47.733,75.711) 47.733,76.073 cw(c47.733,76.435) v1@47.477,76.179 ; U1.19@50.363,61.646 50.363,60.508 50.8,60.071 51.943,60.071 52.959,61.087 C6.1@54.999,61.087 54.991,61.095 v1(54.991,62.103) ; v1@54.885,61.997 cw(c54.629,61.741) 54.991,61.741 cw(c55.353,61.741) v1@55.097,61.997 ; U2.7@55.205,69.977 U2.8@55.205,71.247 55.205,72.604 v1(55.245,72.644) ; U3.8@55.205,78.613 U3.7@55.205,77.343 v1(57.277,77.343) ; R1.2@56.896,54.237 57.793,54.237 JP3.5@58.42,54.864 ; v1@57.171,77.237 ccw(c56.915,76.981) 56.915,77.343 ccw(c56.915,77.705) v1@57.171,77.449 ; JP3.5@58.07,54.864 cw(c57.225,54.864) 57.823,54.267 cw(c58.42,53.669) JP3.5@58.42,54.514
  Top Layer w0.4: L1.2@55.703,30.365 C23.1@57.277,30.365 ; C23.1@57.277,30.099 v1(58.293,29.083)
  Top Layer w0.6: C29.1@17.145,20.836 U11.16@19.359,20.836
  Top Layer w0.7: JP2.2@2,21.13 v1(6.302,21.13) ; JP2.2@2.283,20.847 cw(c2.966,20.164) 2.966,21.13 cw(c2.966,22.096) JP2.2@2.283,21.413 ; v1(14.351,17.145) C30.1@14.351,19.05 ; C30.1@15.359,19.05 C29.1@17.145,20.836
  Top Layer w0.8: C15.1@82.55,42.426 84.621,42.426 84.836,42.211 U9.3@84.836,37.973 ; U9.3@84.553,38.256 ccw(c83.87,38.939) 84.836,38.939 ccw(c85.802,38.939) U9.3@85.119,38.256
12V: C13.1 D1.1 D2.1 JP1.5 U9.1 | length 131.2
  Top Layer w0.8: C13.1@89.908,42.418 C13.1@89.916,42.41
  Top Layer w1: v3(83.566,74.549) 86.614,71.501 D1.1@86.614,71.12 D2.1@88.265,71.12 88.265,66.294 93.345,61.214 93.345,45.855 C13.1@89.908,42.418 ; U9.1@89.916,37.973 C13.1@89.916,42.41
  Bottom Layer w1: JP1.5@2,58.57 18.819,58.57 31.369,71.12 59.69,71.12 63.119,74.549 v3(83.566,74.549)
GND: C1.2 C2.2 C3.2 C4.2 C5.2 C6.2 C7.2 C8.2 C9.2 C10.2 C11.2 C12.2 C13.2 C14.2 C15.2 C16.2 C17.2 C18.2 C19.2 C20.2 C21.2 C22.2 C23.2 C24.2 C25.2 C26.2 C27.2 C28.2 C29.2 C30.2 C33.2 C34.2 J1.12 J1.14 J1.MH1 J1.MH2 JP2.1 JP3.2 R11.1 R14.1 U1.9 U1.20 U1.25 U1.41 U2.4 U3.4 U4.4 U5.1 U6.9 U7.24 U7.25 U7.33 U8.2 U9.2 U10.7 U11.15 X1.10 X2.2 X3.10 | length 98.3
  Top Layer w0.254: U6.9@18.034,54.101 v1(19.811,54.101) ; v1@19.689,53.979 ccw(c19.393,53.683) 19.393,54.101 ccw(c19.393,54.519) v1@19.689,54.223 ; v1@22.23,16.632 ccw(c21.934,16.928) 22.352,16.928 ccw(c22.77,16.928) v1@22.474,16.632 ; v1(22.352,16.51) C34.2@22.352,17.788 ; C33.2@27.551,27.178 v1(28.508,26.222) v1@28.448,26.162 ; v1@28.335,26.222 ccw(c27.917,26.222) 28.212,26.517 ccw(c28.508,26.812) v1@28.508,26.395 ; v1@30.231,58.298 cw(c29.935,58.002) 30.353,58.002 cw(c30.771,58.002) v1@30.475,58.298 ; C7.2@30.353,57.396 v1(30.353,58.42) ; v1@37.973,58.501 cw(c37.973,58.083) 38.268,58.379 cw(c38.564,58.674) v1@38.146,58.674 ; v1(37.973,58.674) 38.854,57.793 C8.2@38.854,57.396 ; v1@39.502,62.108 cw(c39.206,61.812) 39.624,61.812 cw(c40.042,61.812) v1@39.746,62.108 ; U5.1@39.624,61.214 v1(39.624,62.23) ; v1@40.137,59.695 cw(c39.841,59.399) 40.259,59.399 cw(c40.677,59.399) v1@40.381,59.695 ; C4.2@40.259,58.801 v1(40.259,59.817) ; v1(40.767,30.353) C16.2@41.972,30.353 ; v1@40.889,30.231 cw(c41.185,29.935) 41.185,30.353 cw(c41.185,30.771) v1@40.889,30.475 ; v1(41.148,31.496) C21.2@42.299,31.496 ; v1@41.27,31.374 cw(c41.566,31.078) 41.566,31.496 cw(c41.566,31.914) v1@41.27,31.618 ; U1.41@42.063,55.846 v1(44.035,55.846) ; v1@43.185,25.786 cw(c42.889,25.49) 43.307,25.49 cw(c43.725,25.49) v1@43.429,25.786 ; C18.2@43.307,24.703 v1(43.307,25.908) ; v1@43.913,55.724 ccw(c43.617,55.428) 43.617,55.846 ccw(c43.617,56.264) v1@43.913,55.968 ; v1@44.847,32.496 ccw(c44.551,32.792) 44.969,32.792 ccw(c45.387,32.792) v1@45.091,32.496 ; v1@44.969,32.547 ccw(c44.969,32.965) 45.264,32.669 ccw(c45.56,32.374) v1@45.142,32.374 ; U7.24@44.969,34.191 v1(44.969,32.374) 45.769,33.174 U7.25@45.769,33.391 ; v1@45.471,25.786 cw(c45.175,25.49) 45.593,25.49 cw(c46.011,25.49) v1@45.715,25.786 ; C20.2@45.593,24.703 v1@45.593,25.654 ; C1.2@46.859,46.486 47.121,46.486 47.371,46.736 47.99,46.736 48.054,46.8 v1(48.76,46.8) ; v1@47.122,43.378 cw(c46.826,43.082) 47.244,43.082 cw(c47.662,43.082) v1@47.366,43.378 ; C12.2@47.244,42.029 v1@47.244,43.307 ; v1@47.249,25.786 cw(c46.953,25.49) 47.371,25.49 cw(c47.789,25.49) v1@47.493,25.786 ; C19.2@47.371,24.703 v1@47.371,25.654 ; v1@48.638,46.678 ccw(c48.342,46.382) 48.342,46.8 ccw(c48.342,47.218) v1@48.638,46.922 ; v1@49.535,25.786 cw(c49.239,25.49) 49.657,25.49 cw(c50.075,25.49) v1@49.779,25.786 ; v1@49.535,32.136 cw(c49.239,31.84) 49.657,31.84 cw(c50.075,31.84) v1@49.779,32.136 ; C17.2@49.657,24.703 v1@49.657,25.654 ; C22.2@49.657,31.234 v1(49.657,32.258) ; v1(50.673,29.21) 51.435,29.972 R14.1@51.435,30.161 ; v1@50.673,29.383 ccw(c50.673,29.801) 50.968,29.505 ccw(c51.264,29.21) v1@50.846,29.21 ; v1@51.181,56.977 cw(c51.181,56.559) 51.476,56.855 cw(c51.772,57.15) v1@51.354,57.15 ; v1(51.181,57.15) 51.985,56.346 U1.9@53.163,56.346 ; C25.2@51.816,38.219 52.27,38.673 C26.2@53.086,38.673 ; v1@52.964,39.756 cw(c52.668,39.46) 53.086,39.46 cw(c53.504,39.46) v1@53.208,39.756 ; v1(53.086,39.878) C26.2@53.086,38.673 ; v1@54.726,33.793 ccw(c54.43,34.089) 54.848,34.089 ccw(c55.266,34.089) v1@54.97,33.793 ; v1(54.848,33.671) R11.1@54.848,34.671 ; U8.2@55.05,38.354 54.731,38.673 C26.2@53.086,38.673 ; C24.2@55.741,28.333 C24.2@55.741,28.448 ; C5.2@56.126,56.896 56.126,56.015 v1(56.134,56.007)
  Top Layer w0.3: v1@36.743,65.149 ccw(c36.487,65.405) 36.849,65.405 ccw(c37.211,65.405) v1@36.955,65.149 ; v1(36.849,65.043) U4.4@36.849,65.954 ; C9.2@43.426,68.834 v1(44.323,68.834) ; v1@44.217,68.728 ccw(c43.961,68.472) 43.961,68.834 ccw(c43.961,69.196) v1@44.217,68.94 ; v1(47.371,59.944) 47.363,59.952 U1.25@47.363,61.646 47.363,62.603 47.863,63.103 C3.2@47.863,63.373 ; v1(47.371,67.691) 48.379,67.691 C10.2@48.387,67.699 48.887,67.699 49.149,67.437 U2.4@50.205,67.437 ; v1@47.477,67.585 cw(c47.733,67.329) 47.733,67.691 cw(c47.733,68.053) v1@47.477,67.797 ; v1@48.154,74.215 ccw(c47.898,74.471) 48.26,74.471 ccw(c48.622,74.471) v1@48.366,74.215 ; v1(48.26,74.109) C11.2@48.26,75.065 48.76,75.065 49.022,74.803 U3.4@50.205,74.803 ; v1(49.863,59.738) U1.20@49.863,61.646 ; C6.2@55.999,61.087 v1(57.023,61.087) ; v1@56.917,60.981 ccw(c56.661,60.725) 56.661,61.087 ccw(c56.661,61.449) v1@56.917,61.193 ; v1(85.932,64.944) C28.2@85.932,67.437
  Top Layer w0.4: C24.2@55.741,28.333 v1(56.769,27.305)
  Top Layer w0.6: v1(11.938,21.844) C30.2@14.351,21.844 17.78,21.844 18.034,22.098 U11.15@19.367,22.098 ; C23.2@57.277,31.865 v1(57.277,33.655) ; C15.2@82.55,43.426 v1(82.55,44.704) ; C14.2@87.376,42.338 C14.2@87.456,42.418 C13.2@88.781,42.418 ; v1(89.281,45.466) C27.2@89.281,49.864
  Top Layer w0.7: JP2.1@2,18.59 v1(6.302,18.59) ; JP2.1@2.283,18.307 cw(c2.966,17.624) 2.966,18.59 cw(c2.966,19.556) JP2.1@2.283,18.873
  Top Layer w1: U9.2@87.376,37.973 C14.2@87.376,42.338
  other v1: 45.593,25.908 47.371,25.908 49.657,25.908 47.244,43.5
  other v2: 46.319,34.741 47.519,34.741 48.719,34.741 46.319,35.941 47.519,35.941 48.719,35.941 46.319,37.141 47.519,37.141 48.719,37.141
NetC1_1: C1.1 U1.56 | length 3.2
  Top Layer w0.3: C1.1@46.736,47.628 46.736,48.337 47.363,48.964 U1.56@47.363,50.546
NetC7_1: C7.1 Q1.1 U1.40 | length 13.1
  Top Layer w0.254: C7.1@30.353,56.396 32.123,56.396 Q1.1@32.131,56.388 33.782,54.737 38.354,54.737 39.963,56.346 U1.40@42.063,56.346
NetC8_1: C8.1 Q1.2 U1.39 | length 5
  Top Layer w0.254: Q1.2@37.211,56.388 37.219,56.396 C8.1@38.862,56.396 39.312,56.846 U1.39@42.063,56.846
NetC16_1: C16.1 C21.1 C22.1 C24.1 J1.3 J1.4 L1.1 R7.2 R8.2 R9.2 R10.2 U7.1 U7.27 | length 28.8
  Top Layer w0.254: v1@43.185,29.088 cw(c42.889,28.792) 43.307,28.792 cw(c43.725,28.792) v1@43.429,29.088 ; v1@43.185,29.332 ccw(c42.889,29.628) 43.307,29.628 ccw(c43.725,29.628) v1@43.429,29.332 ; R8.2@43.307,28.059 v1(43.307,29.21) C16.1@43.307,30.288 ; C16.1@43.372,30.353 43.299,30.426 C21.1@43.299,31.496 45.466,31.496 46.769,32.799 U7.27@46.769,33.391 ; v1@45.471,29.088 cw(c45.175,28.792) 45.593,28.792 cw(c46.011,28.792) v1@45.715,29.088 ; R10.2@45.593,28.059 v1(45.593,29.21) ; v1@47.249,29.088 cw(c46.953,28.792) 47.371,28.792 cw(c47.789,28.792) v1@47.493,29.088 ; R9.2@47.371,28.059 v1(47.371,29.21) ; v1@49.535,29.088 cw(c49.239,28.792) 49.657,28.792 cw(c50.075,28.792) v1@49.779,29.088 ; v1@49.535,29.332 ccw(c49.239,29.628) 49.657,29.628 ccw(c50.075,29.628) v1@49.779,29.332 ; R7.2@49.657,28.059 v1(49.657,29.21) C22.1@49.657,30.234 ; U7.1@50.069,34.191 51.407,34.191 53.086,32.512 53.086,29.325 C24.1@54.102,28.309 ; C24.1@54.241,28.448 C24.1@54.291,28.498
  Top Layer w0.4: v1(54.102,26.416) 54.102,28.309 C24.1@54.241,28.448 ; C24.1@54.291,28.498 L1.1@54.291,30.353
NetC17_1: C17.1 J1.5 R7.1 U7.31 | length 31.5
  Top Layer w0.254: J1.5@47.524,18.679 cw(c46.461,17.616) 47.965,17.616 cw(c49.469,17.616) J1.5@48.406,18.679 ; J1.5@47.704,18.859 cw(c47.074,18.229) 47.965,18.229 cw(c48.856,18.229) J1.5@48.226,18.859 ; J1.5@47.965,19.12 47.965,15.916 48.514,15.367 49.911,15.367 50.546,16.002 50.546,17.145 51.816,18.415 51.816,19.431 50.927,20.32 50.165,20.32 48.768,21.717 48.768,23.241 ; U7.31@48.769,33.391 48.768,27.051 ; C17.1@49.657,23.303 48.83,23.303 48.768,23.241 ; R7.1@49.657,27.059 48.776,27.059 48.768,27.051 ; 48.768,23.241 48.768,27.051
NetC18_1: C18.1 J1.2 R8.1 U7.28 | length 23.6
  Top Layer w0.254: C18.1@43.307,23.303 44.093,23.303 44.155,23.241 ; R8.1@43.307,27.059 44.147,27.059 44.155,27.051 ; J1.2@43.714,17.021 ccw(c42.651,18.084) 44.155,18.084 ccw(c45.659,18.084) J1.2@44.596,17.021 ; J1.2@43.894,16.841 ccw(c43.264,17.471) 44.155,17.471 ccw(c45.046,17.471) J1.2@44.416,16.841 ; J1.2@44.155,16.58 44.155,23.241 ; U7.28@47.269,33.391 47.269,32.537 44.155,29.423 44.155,27.051 ; 44.155,23.241 44.155,27.051
NetC19_1: C19.1 J1.6 R9.1 U7.30 | length 22.8
  Top Layer w0.254: C19.1@47.371,23.303 48.198,23.303 48.26,23.241 ; R9.1@47.371,27.059 48.252,27.059 48.26,27.051 ; U7.30@48.26,33.391 48.26,27.051 ; J1.6@48.794,17.021 ccw(c47.731,18.084) 49.235,18.084 ccw(c50.739,18.084) J1.6@49.676,17.021 ; J1.6@48.974,16.841 ccw(c48.344,17.471) 49.235,17.471 ccw(c50.126,17.471) J1.6@49.496,16.841 ; J1.6@49.235,16.58 49.235,20.488 48.26,21.463 48.26,23.241 ; 48.26,23.241 48.26,27.051
NetC20_1: C20.1 J1.1 R10.1 U7.29 | length 31.5
  Top Layer w0.254: J1.1@42.444,18.679 cw(c41.381,17.616) 42.885,17.616 cw(c44.389,17.616) J1.1@43.326,18.679 ; J1.1@42.624,18.859 cw(c41.994,18.229) 42.885,18.229 cw(c43.776,18.229) J1.1@43.146,18.859 ; J1.1@42.885,19.12 42.885,16.17 43.561,15.494 44.831,15.494 45.668,16.331 45.668,17.347 46.736,18.415 46.736,19.431 44.704,21.463 44.704,23.368 ; C20.1@45.593,23.303 44.769,23.303 44.704,23.368 ; R10.1@45.593,27.059 44.712,27.059 44.704,27.051 ; U7.29@47.769,33.391 47.769,32.402 44.704,29.337 44.704,27.051 ; 44.704,23.368 44.704,27.051
NetC25_1: C25.1 C26.1 U7.6 | length 3.3
  Top Layer w0.254: U7.6@50.069,36.691 50.915,36.691 51.443,37.219 C25.1@51.816,37.219 53.032,37.219 C26.1@53.086,37.273
NetC27_1: C27.1 L2.1 U10.8 | length 24.5
  Top Layer w1: U10.8@68.68,67.24 74.873,67.24 L2.1@74.93,67.183 74.93,64.77 77.724,61.976 88.646,61.976 C27.1@89.281,61.341
NetC28_1: C28.1 D1.2 L2.2 | length 8.5
  Top Layer w1: D1.2@82.804,71.12 81.534,69.85 80.391,69.85 80.391,67.31 L2.2@80.518,67.183 82.978,67.183 C28.1@83.232,67.437
NetC31_1: C31.1 U11.3 | length 2.5
  Top Layer w0.254: U11.3@24.067,23.368 25.646,23.368 C31.1@26.289,22.725
NetC31_2: C31.2 U11.1 | length 2.6
  Top Layer w0.254: U11.1@24.067,20.828 25.392,20.828 C31.2@26.289,21.725
NetC32_1: C32.1 U11.5 | length 2.3
  Top Layer w0.254: U11.5@24.067,25.908 26.154,25.908 C32.1@26.289,25.773